# Altium PCB PCB1.PcbDoc
Units mil, origin at the board's own origin, x right, y up, seen from the top; angles counter-clockwise.
Board outline 2500.99 x 3057.36 mil, 2 copper layers (Top Layer, Bottom Layer); 33 components, 43 nets, 217 pads, 44 vias.
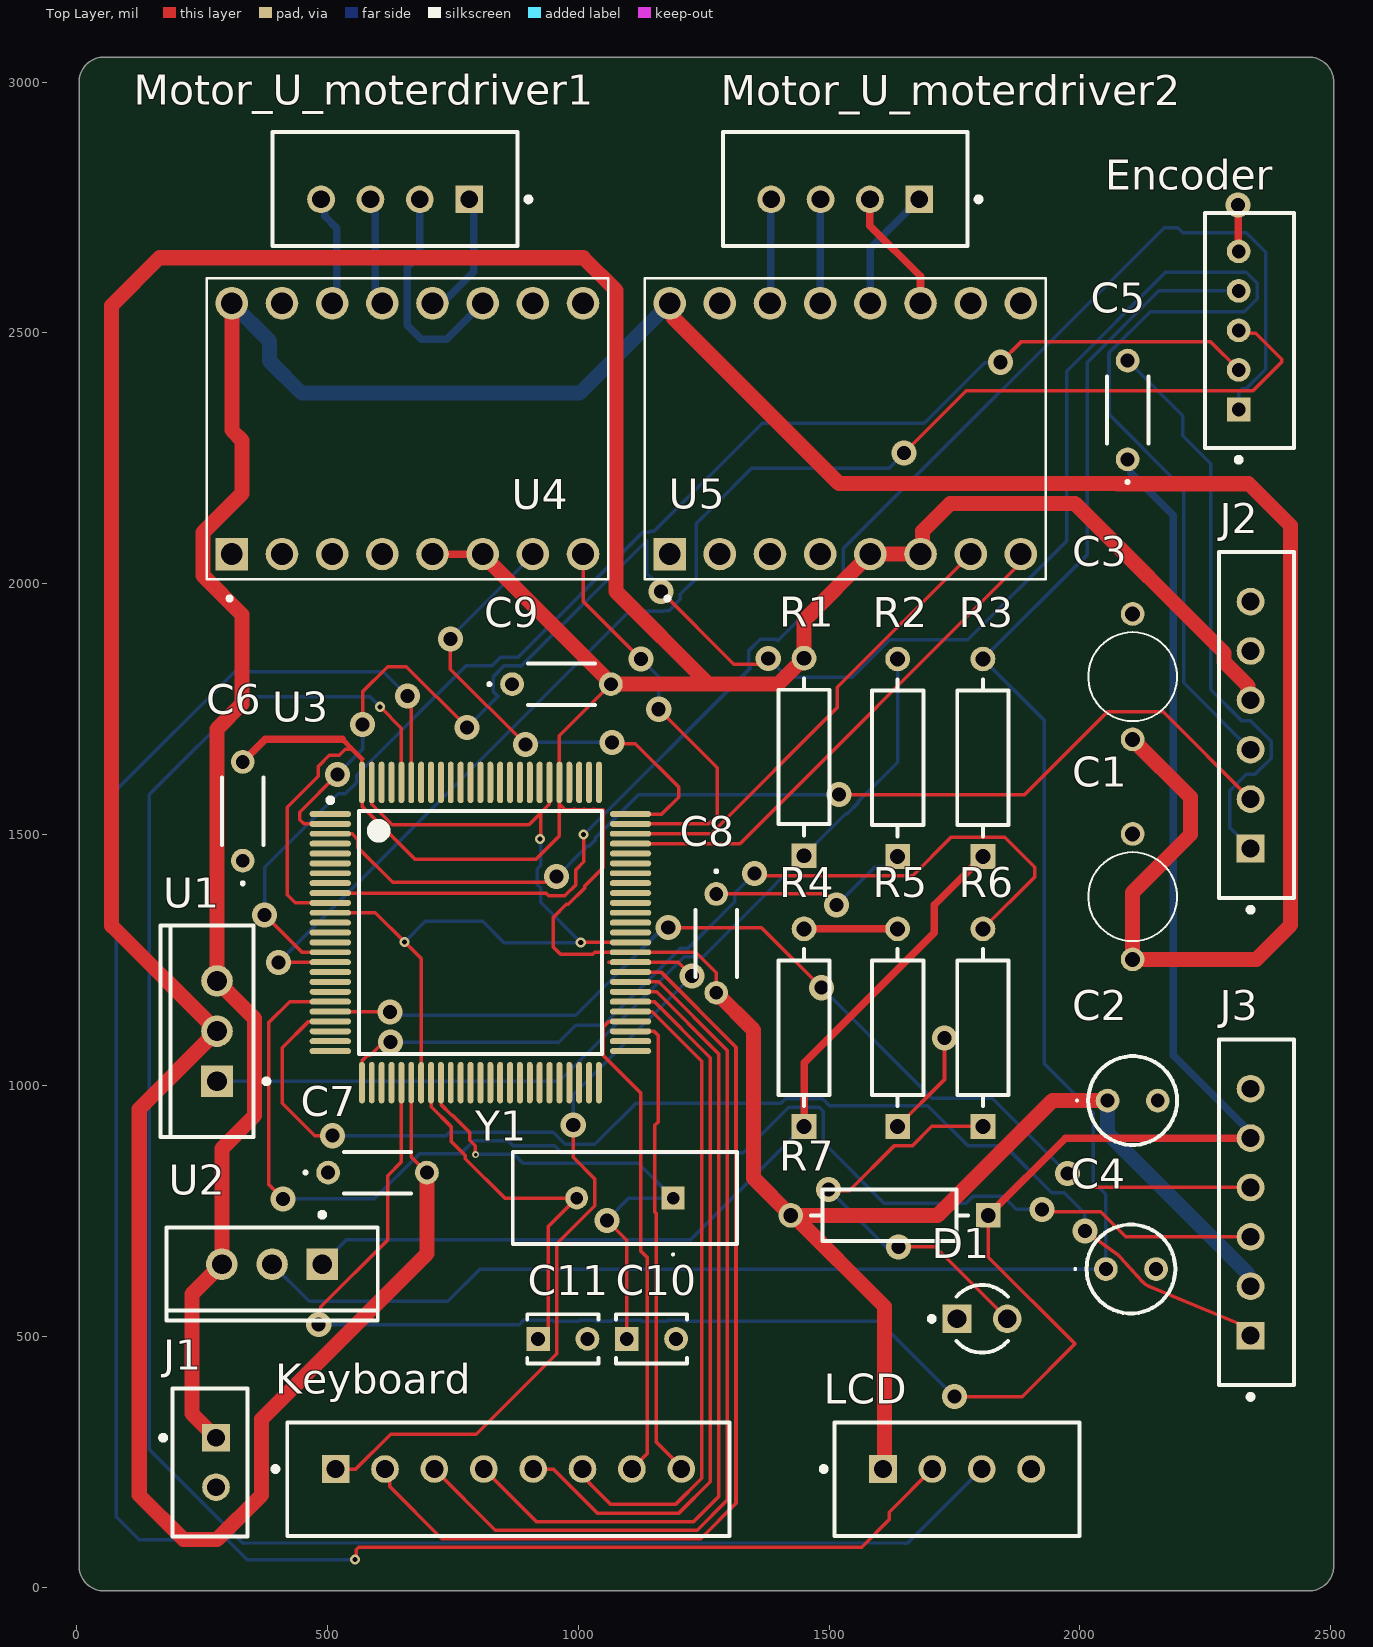
[diagram p0: Top Layer view]
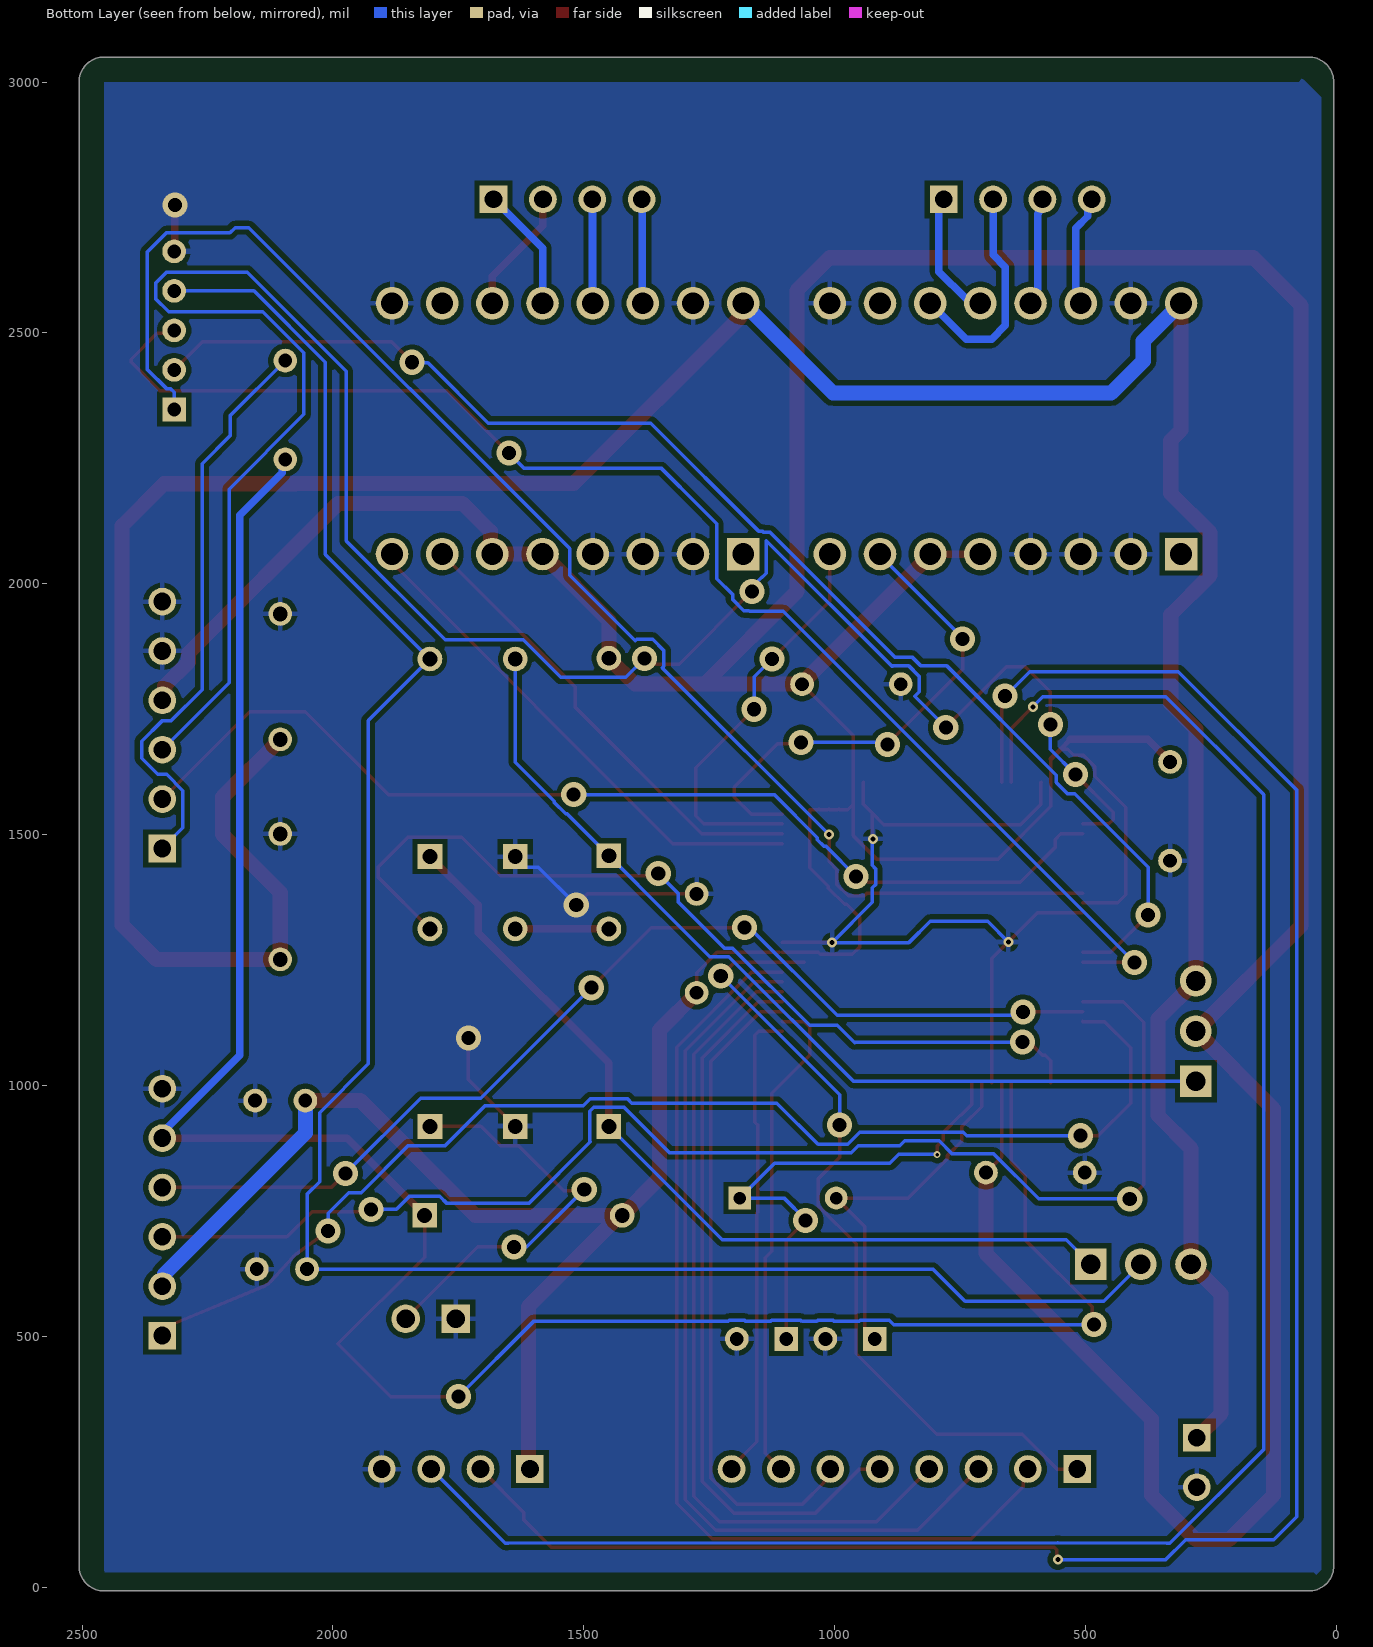
[diagram p1: Bottom Layer view, seen from below]
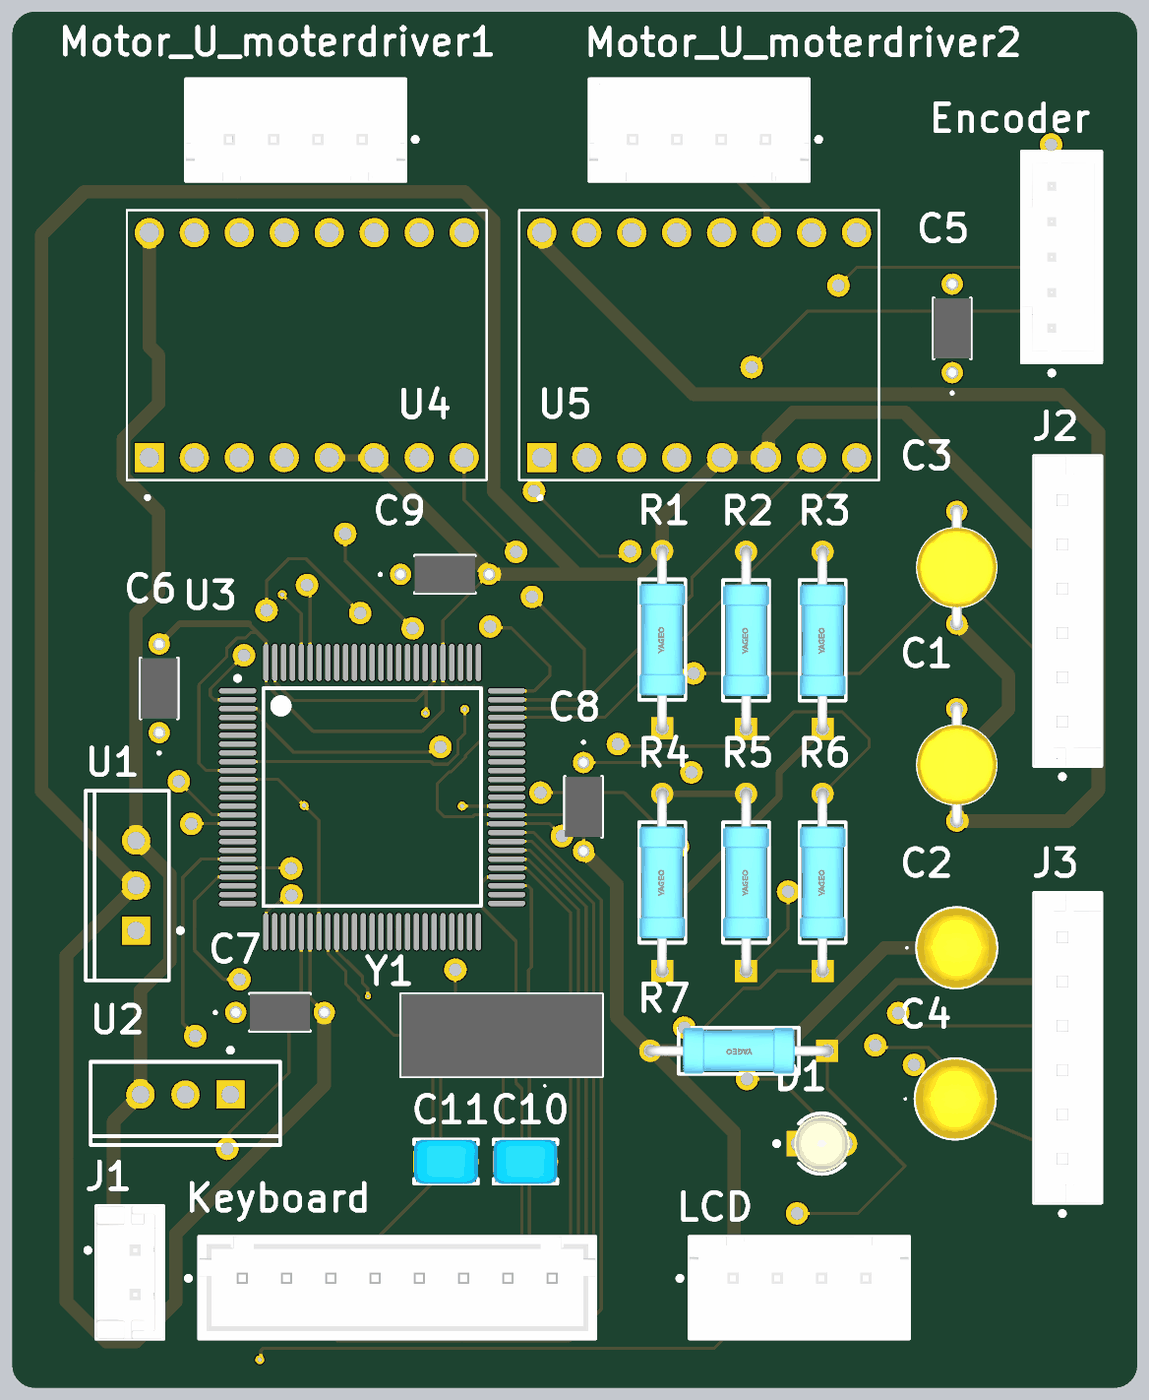
[diagram p2: 3D render of the assembled board from above, using the file's embedded part models]

## Layer stack, top to bottom
Top Solder: solder mask 0.4, Solder Resist, Dk 3.5
Top Layer: signal copper 1.4
Dielectric 1: dielectric 12.6, FR-4, Dk 4.8
Bottom Layer: signal copper 1.4
Bottom Solder: solder mask 0.4, Solder Resist, Dk 3.5

## Board outline
5,42.64 5,3000 cw(c55,3000) 55,3050 2455.99,3050 cw(c2455.99,3000) 2505.99,3000 2505.99,42.64 cw(c2455.99,42.64) 2455.99,-7.36 55,-7.36 cw(c55,42.64)

## Design rules (kind name [scope] priority, off if disabled: settings)
BoardOutlineClearance [All] p1: gap=7.87 ignorepadtopadclearanceinfootprint=FALSE
Clearance [All] p1: gap=8 ignorepadtopadclearanceinfootprint=TRUE except(9.84: Arc-Hole Track-Hole SMDPad-Hole THPad-Hole Via-Hole Fill-Hole Poly-Hole Region-Hole Text-Hole)
ComponentClearance [All] p1: gap=5 collisioncheckmode=3 verticalgap=5 showdistances=TRUE
DiffPairsRouting [All] p1: maxlimit=15 minlimit=7 mostfreqgap=8 toplayer_minwidth=7 toplayer_maxwidth=1000 toplayer_prefwidth=8 bottomlayer_minwidth=7 bottomlayer_maxwidth=1000 bottomlayer_prefwidth=8 maxuncoupledlength=500
Height [All] p1: minheight=0 maxheight=71497.94 prefheight=500
HoleSize [All] p1: absolutevalues=TRUE maxlimit=248.03 minlimit=11.81 maxpercent=80.000 minpercent=20.000
HoleToHoleClearance [All] p1: gap=9.84 allowstackedmicrovias=FALSE
MinimumAnnularRing [All] p1: minimumring=3
MinimumSolderMaskSliver [All] p1: minsoldermaskwidth=0
PlaneClearance [All] p1: clearance=8
PlaneConnect PlaneConnectPowerPads [InPadClass('PowerPads')] p1: planeconnectstyle=Direct reliefexpansion=20 reliefentries=4 reliefconductorwidth=10 reliefairgap=10
PlaneConnect [All] p2: pad.planeconnectstyle=Relief pad.reliefexpansion=11.81 pad.reliefentries=4 pad.reliefconductorwidth=8 pad.reliefairgap=8 via.planeconnectstyle=Direct via.reliefexpansion=11.81 via.reliefentries=4 via.reliefconductorwidth=5 via.reliefairgap=5
PolygonConnect PolygonConnectPowerPads [All vs (InPadClass('PowerPads'))] p1: connectstyle=Direct reliefconductorwidth=10 reliefentries=4 polygonreliefangle="90 Angle" airgapwidth=10
PolygonConnect [All] p2: thpad.connectstyle=Relief thpad.reliefconductorwidth=8 thpad.reliefentries=4 thpad.polygonreliefangle="90 Angle" thpad.airgapwidth=8 smdpad.connectstyle=Relief smdpad.reliefconductorwidth=8 smdpad.reliefentries=4 smdpad.polygonreliefangle="90 Angle" smdpad.airgapwidth=8 via.connectstyle=Direct via.reliefconductorwidth=5 via.reliefentries=4 via.polygonreliefangle="90 Angle" via.airgapwidth=5
RoutingVias [All] p1: holewidth=11.81 width=23.62 viastyle="Through Hole" minholewidth=11.81 minwidth=23.62 maxholewidth=23.62 maxwidth=259.84
SilkToSilkClearance [All] p1: silktosilkclearance=0
SilkToSolderMaskClearance [IsPad] p1: minsilkscreentomaskgap=5 clearancetoexposedcopper=TRUE
SolderMaskExpansion [All] p1: expansion=2.95 istentingtop=FALSE
Width [All] p1: maxlimit=1000 minlimit=7 preferedwidth=8 minimp=50.000000 maximp=50.000000 favimp=50.000000
20 further rules are at their usual default settings.

## Classes and differential pairs
channel class moterdriver: U_moterdriver1 U_moterdriver2
component class "U_power supply": C1 C2 C3 C4 J1 R1 R2 R3 R4 R5 U1 U2
component class U_moterdriver2: Motor_U_moterdriver2 U5
component class U_moterdriver1: Motor_U_moterdriver1 U4
component class U_inputs: Encoder Keyboard LCD
component class U_atmel: C5 C6 C7 C8 C9 C10 C11 D1 J2 J3 R6 R7 U3 Y1

## Components (designator, comment, footprint, x,y, rotation, side; value= is the part's Value field where it differs from the comment)
C1 "T354A105J035AT7301" T354A105J035AT7301 2105,1251.46 r90 top
C2 "T350A104K050AT" T350A104K050AT 2055,970.08 r0 top
C3 "T354A105J035AT7301" T354A105J035AT7301 2105,1690 r90 top
C4 "T350A104K050AT" T350A104K050AT 2051.62,634.33 r0 top
C5 "K104K15X7RH53H5G" K104K15X7RH53H5G 2095,2248.15 r90 top
C6 "K104K15X7RH53H5G" K104K15X7RH53H5G 331.35,1448.22 r90 top
C7 "K104K15X7RH53H5G" K104K15X7RH53H5G 501.52,826.53 r0 top
C8 "K104K15X7RH53H5G" K104K15X7RH53H5G 1275,1381.85 r270 top
C9 "K104K15X7RH53H5G" K104K15X7RH53H5G 868.15,1800 r0 top
C10 "RCE5C2A220J0DBH03A" FP-RCE0DB-MFG 1145.74,495 r0 top
C11 "RCE5C2A220J0DBH03A" FP-RCE0DB-MFG 969.21,495 r0 top
D1 "HLMP-1719" FP-HLMP-1719-MFG 1805,535 r0 top
Encoder "B5B-PH-K-S(LF)(SN)" FP-B5B-PH-K-S_LF_SN-MFG 2338.03,2505.17 r90 top
J1 "B2B-EH-A(LF)(SN)" FP-B2B-EH-A_LF_SN-MFG 266.2,248.78 r270 top
J2 "B6B-EH-A(LF)(SN)" FP-B6B-EH-A_LF_SN-MFG 2351.81,1718.58 r90 top
J3 "B6B-EH-A(LF)(SN)" FP-B6B-EH-A_LF_SN-MFG 2351.81,747.64 r90 top
Keyboard "B8B-XH-A(LF)(SN)" FP-B8B-XH-A_LF_SN-MFG 860.89,215 r180 top
LCD "B4B-XH-A(LF)(SN)" FP-B4B-XH-A_LF_SN-MFG 1755,215 r180 top
Motor_U_moterdriver1 "B4B-XH-A(LF)(SN)" FP-B4B-XH-A_LF_SN-MFG 635,2787.01 r0 top (schematic designator Motor)
Motor_U_moterdriver2 "B4B-XH-A(LF)(SN)" FP-B4B-XH-A_LF_SN-MFG 1532.18,2787.01 r0 top (schematic designator Motor)
R1 "MFR-25FBF52-1K18" FP-MFR-25-MFG 1450,1655 r90 top value=1.18kΩ
R2 "MFR-25FBF52-1K18" FP-MFR-25-MFG 1636.53,1653.35 r90 top value=1.18kΩ
R3 "MFR-25FBF52-1K18" FP-MFR-25-MFG 1806.61,1653.35 r90 top value=1.18kΩ
R4 "MFR-25FBF52-1K18" FP-MFR-25-MFG 1450,1115.4 r90 top value=1.18kΩ
R5 "MFR-25FBF52-1K18" FP-MFR-25-MFG 1636.53,1115.4 r90 top value=1.18kΩ
R6 "MFR-25FBF52-1K18" FP-MFR-25-MFG 1806.61,1115.4 r90 top value=1.18kΩ
R7 "MFR-25FBF52-1K18" FP-MFR-25-MFG 1620.28,741.23 r180 top value=1.18kΩ
U1 "LM317T" NDE0003A 279.98,1108.5 r90 top
U2 "LM317T" NDE0003A 389.73,644.05 r180 top
U3 "ATmega2560-16AU" 100A_M 805,1305 r0 top
U4 "DRV8825_STEPPER_MOTOR_DRIVER_CARRIER" IC_DRV8825_STEPPER_MOTOR_DRIVER_CARRIER 659.5,2309.31 r90 top
U5 "DRV8825_STEPPER_MOTOR_DRIVER_CARRIER" IC_DRV8825_STEPPER_MOTOR_DRIVER_CARRIER 1532.18,2309.31 r90 top (schematic designator U4)
Y1 "ECS-160-S-4" ECS160S4 1188.98,775.79 r180 top

## Footprints (in the part's own frame and the unit in brackets; to place one, negate y for a bottom-side part, rotate by r counter-clockwise, add the part's x,y. Pads: shape width x height; smd on the part's side, far side on the other; paste and mask are expansions set on the pad)
100A_M [mm] "Thin QFP, 100-Leads, Body 14x14mm, Pitch 0.5mm, IPC Low Density"
  oval 2.1x0.3 smd: 1(-7.6,6) 2(-7.6,5.5) 3(-7.6,5) 4(-7.6,4.5) 5(-7.6,4) 6(-7.6,3.5) 7(-7.6,3) 8(-7.6,2.5) 9(-7.6,2) 10(-7.6,1.5) 11(-7.6,1) 12(-7.6,0.5) 13(-7.6,0) 14(-7.6,-0.5) 15(-7.6,-1) 16(-7.6,-1.5) 17(-7.6,-2) 18(-7.6,-2.5) 19(-7.6,-3) 20(-7.6,-3.5) 21(-7.6,-4) 22(-7.6,-4.5) 23(-7.6,-5) 24(-7.6,-5.5) 25(-7.6,-6) 51(7.6,-6) 52(7.6,-5.5) 53(7.6,-5) 54(7.6,-4.5) 55(7.6,-4) 56(7.6,-3.5) 57(7.6,-3) 58(7.6,-2.5) 59(7.6,-2) 60(7.6,-1.5) 61(7.6,-1) 62(7.6,-0.5) 63(7.6,0) 64(7.6,0.5) 65(7.6,1) 66(7.6,1.5) 67(7.6,2) 68(7.6,2.5) 69(7.6,3) 70(7.6,3.5) 71(7.6,4) 72(7.6,4.5) 73(7.6,5) 74(7.6,5.5) 75(7.6,6)
  oval 0.3x2.1 smd: 26(-6,-7.6) 27(-5.5,-7.6) 28(-5,-7.6) 29(-4.5,-7.6) 30(-4,-7.6) 31(-3.5,-7.6) 32(-3,-7.6) 33(-2.5,-7.6) 34(-2,-7.6) 35(-1.5,-7.6) 36(-1,-7.6) 37(-0.5,-7.6) 38(0,-7.6) 39(0.5,-7.6) 40(1,-7.6) 41(1.5,-7.6) 42(2,-7.6) 43(2.5,-7.6) 44(3,-7.6) 45(3.5,-7.6) 46(4,-7.6) 47(4.5,-7.6) 48(5,-7.6) 49(5.5,-7.6) 50(6,-7.6) 76(6,7.6) 77(5.5,7.6) 78(5,7.6) 79(4.5,7.6) 80(4,7.6) 81(3.5,7.6) 82(3,7.6) 83(2.5,7.6) 84(2,7.6) 85(1.5,7.6) 86(1,7.6) 87(0.5,7.6) 88(0,7.6) 89(-0.5,7.6) 90(-1,7.6) 91(-1.5,7.6) 92(-2,7.6) 93(-2.5,7.6) 94(-3,7.6) 95(-3.5,7.6) 96(-4,7.6) 97(-4.5,7.6) 98(-5,7.6) 99(-5.5,7.6) 100(-6,7.6)
  silkscreen extent -7.72,-6.15 6.15,6.82, body extent -7,-7 7,7, height 1.6
ECS160S4 [mm]
  rect 1.155x1.155 hole 0.63: 1(0,0)
  round 1.155 hole 0.63: 2(4.88,0)
  silkscreen extent -3.23,-2.32 8.12,2.9, body extent -3.23,-2.32 8.12,2.32, height 3.6
FP-B2B-EH-A_LF_SN-MFG [mm]
  rect 1.4x1.4 hole 0.9 paste-1000 mask+0: 1(-1.25,0.3)
  round 1.4 hole 0.9 paste-1000 mask+0: 2(1.25,0.3)
  silkscreen extent -3.75,-2.5 3.75,1.9, body extent -3.85,-2 3.85,2, height 0.25
FP-B4B-XH-A_LF_SN-MFG [mm]
  rect 1.4x1.4 hole 0.9 paste-1000 mask+0: 1(3.75,-0.525)
  round 1.4 hole 0.9 paste-1000 mask+0: 2(1.25,-0.525) 3(-1.25,-0.525) 4(-3.75,-0.525)
  silkscreen extent -6.2,-2.88 6.87,2.88, body extent -6.3,-2.98 6.3,2.98, height 0.25
FP-B5B-PH-K-S_LF_SN-MFG [mm]
  rect 1.2x1.2 hole 0.7 paste-1000 mask+0: 1(-4,0.55)
  round 1.2 hole 0.7 paste-1000 mask+0: 2(-2,0.55) 3(0,0.55) 4(2,0.55) 5(4,0.55)
  silkscreen extent -6.67,-2.25 5.95,2.25, body extent -6.05,-2.35 6.05,2.35, height 0.25
FP-B6B-EH-A_LF_SN-MFG [mm]
  rect 1.4x1.4 hole 0.9 paste-1000 mask+0: 1(-6.25,0.3)
  round 1.4 hole 0.9 paste-1000 mask+0: 2(-3.75,0.3) 3(-1.25,0.3) 4(1.25,0.3) 5(3.75,0.3) 6(6.25,0.3)
  silkscreen extent -9.47,-1.9 8.75,1.9, body extent -8.85,-2 8.85,2, height 0.25
FP-B8B-XH-A_LF_SN-MFG [mm]
  rect 1.4x1.4 hole 0.9 paste-1000 mask+0: 1(8.75,-0.525)
  round 1.4 hole 0.9 paste-1000 mask+0: 2(6.25,-0.525) 3(3.75,-0.525) 4(1.25,-0.525) 5(-1.25,-0.525) 6(-3.75,-0.525) 7(-6.25,-0.525) 8(-8.75,-0.525)
  silkscreen extent -11.2,-2.88 11.92,2.88, body extent -11.3,-2.98 11.3,2.98, height 0.25
FP-HLMP-1719-MFG [mm]
  rect 1.45x1.45 hole 0.95 paste-1000 mask+0: 1(-1.27,0)
  round 1.45 hole 0.95 paste-1000 mask+0: 2(1.27,0)
  silkscreen extent -2.67,-1.71 1.3,1.71, body extent -2.22,-2.22 2.22,2.22, height 0.25
FP-MFR-25-MFG [mm]
  rect 1.25x1.25 hole 0.75 paste-1000 mask+0: 1(-5,0)
  round 1.25 hole 0.75 paste-1000 mask+0: 2(5,0)
  silkscreen extent -3.98,-1.3 3.98,1.3, body extent -5.72,-1.4 5.72,1.4, height 0.25
FP-RCE0DB-MFG [mm]
  rect 1.2x1.2 hole 0.7 paste-1000 mask+0: 1(-1.25,0)
  round 1.2 hole 0.7 paste-1000 mask+0: 2(1.25,0)
  silkscreen extent -1.8,-1.25 1.8,1.25, body extent -1.95,-1.35 1.95,1.35, height 0.25
IC_DRV8825_STEPPER_MOTOR_DRIVER_CARRIER [mm]
  rect 1.65x1.65 hole 1.1: 1(-6.35,8.89)
  round 1.65 hole 1.1: 2(-6.35,6.35) 3(-6.35,3.81) 4(-6.35,1.27) 5(-6.35,-1.27) 6(-6.35,-3.81) 7(-6.35,-6.35) 8(-6.35,-8.89) 9(6.35,-8.89) 10(6.35,-6.35) 11(6.35,-3.81) 12(6.35,-1.27) 13(6.35,1.27) 14(6.35,3.81) 15(6.35,6.35) 16(6.35,8.89)
  silkscreen extent -8.7,-10.16 7.62,10.16
K104K15X7RH53H5G [mm]
  round 1.2 hole 0.7: 1(0,0) 2(5,0)
  silkscreen extent -1.2,-1.05 4.2,1.05, body extent -0.25,-1.05 5.25,1.05, height 6.5
NDE0003A [mm] "FM, 3-Leads, Body 10.7x4.7mm, Pitch 2.54mm"
  rect 1.6x1.6 hole 1: 1(-2.54,0)
  round 1.6 hole 1: 2(0,0) 3(2.54,0)
  silkscreen extent -5.35,-2.63 5.35,2.85, body extent -5.4,-1.9 5.4,2.9, height 19.4
T350A104K050AT [mm]
  round 1.2 hole 0.7: 1(0,0) 2(2.54,0)
  silkscreen extent -1.6,-2.25 3.52,2.25, body extent -0.98,-2.25 3.52,2.25, height 7.04
T354A105J035AT7301 [mm]
  round 1.2 hole 0.75: 1(0,0) 2(6.35,0)
  silkscreen extent 0.92,-2.25 5.43,2.25, body extent -0.27,-2.25 6.63,2.25, height 8.63

## Part data
C1 C3: "Capacitor", Manufacturer_Name=KEMET, Mouser Part Number=80-T354A105J35AT-TR, Datasheet Link=https://content.kemet.com/datasheets/KEM_T2043_T35X.pdf, Height=8.6mm, Manufacturer_Part_Number=T354A105J035AT7301, Mouser Price/Stock=https://www.mouser.co.uk/ProductDetail/KEMET/T354A105J035AT7301?qs=eaG68hM7nzPCdlzS1u%252BjMg%3D%3D
C2 C4: "Capacitor", Manufacturer_Name=KEMET, Mouser Part Number=80-T350A104K50AT, Arrow Part Number=T350A104K050AT, Arrow Price/Stock=https://www.arrow.com/en/products/t350a104k050at/kemet-corporation?region=nac, Datasheet Link=https://content.kemet.com/datasheets/KEM_T2043_T35X.pdf, Height=7.1mm, Manufacturer_Part_Number=T350A104K050AT, Mouser Price/Stock=https://www.mouser.co.uk/ProductDetail/KEMET/T350A104K050AT?qs=O4djsYW3Gvb%252Bsic1QYKKdw%3D%3D
C5 C6 C7 C8 C9: "Capacitor", Manufacturer_Name=Vishay, Mouser Part Number=594-K104K15X7RH53H5G, Datasheet Link=https://www.vishay.com/docs/45250/kgseries.pdf, Height=6.4mm, Manufacturer_Part_Number=K104K15X7RH53H5G, Mouser Price/Stock=https://www.mouser.co.uk/ProductDetail/Vishay-BC-Components/K104K15X7RH53H5G?qs=DPoM0jnrROVmsAlOWkFXbA%3D%3D
C10 C11: library part CMP-06035-047347-1, "Cap Ceramic 22pF 100V C0G ±5% Radial 2.5mm +125°C Ammo Pack", Capacitance=22pF, Case/Package=Radial, Dielectric=C0G, Max Operating Temperature=125°C, Min Operating Temperature=-55°C, Package Quantity=2000, Ratings=AEC-Q200, Resistor Type=Ceramic, Tolerance=5%, Voltage=100V, Depth=2.5mm, Height=3.5mm, Height - Seated (Max)=0.138inch, Lead Diameter=0.5mm, Lead Pitch=0.098inch, Lead/Base Style=Straight, Length=3.6mm, Mount="Through Hole", Packaging="Tape and Reel", Termination=Radial, Voltage Rating=100V, Voltage Rating (DC)=100V, Width=0.098inch
D1: library part CMP-2000-06410-2, "LED YELLOW DIFFUSED T-1 T/H", Colour=Yellow, Forward Current=2mA, Forward Voltage=1.8V, Manufacturer=Broadcom, Package=0, Power Dissipation=17.5mW, Reverse Voltage=5V, Temperature="-40°C to +100°C", Temperature Range High=+100°C, Temperature Range Low=-40°C, Automotive=No, Category=Diode, ComponentLink2Description=Datasheet, ComponentLink2URL=https://docs.broadcom.com/docs/AV02-1557EN, Device Class L1=Optoelectronics, Device Class L2=LEDs, Device Class L3=unset, Digikey Description="LED YELLOW DIFFUSED T-1 T/H", Lead Free=Yes, Led Orientation=Straight, Luminous Intensity=2.1mcd, Manufacturer Part Number=HLMP-1719, Mouser Description="Standard LEDs - Through Hole Yellow Diffused 585nm 2.1mcd", Octopart=https://octopart.com/hlmp-1719-broadcom-71130405, RoHS=TRUE, Viewing Angle=50°, Wavelength=585nm
Encoder: library part CMP-2000-05908-2, "CONN HEADER VERT 5POS 2MM", Color=Natural, Contact Resistance=20mR, Current Rating=2A, Flammability Rating="UL94 V-0", Housing Color=White, Insulation Resistance=1MR, Max Operating Temperature=85°C, Max Voltage Rating (AC)=100V, Min Operating Temperature=-25°C, Connector Type=Header, Contact Finish - Mating=TIN, Contact Material=Brass, Contact Mating Length=0.13inch, Contact Plating=Tin, Contact Shape=Square, Contact Type="Male Pin", Depth=4.5mm, Fastening Type=Detent, Gender=Male, Height=9.4mm, Housing Material=Polyamide, Insulation Color=Natural, Insulation Material=Nylon, Lead Free="Lead Free", Lead Pitch=2mm, Length=11.9mm, Mated Stacking Heights=8mm, Material=Polyamide, Max Current Rating=2A, Mount="Through Hole", Number of Contacts=5, Number of Pins=5, Number of Poles=5, Number of Positions=5, Number of Rows=1, Orientation=Straight, Packaging=Bulk, Pitch=2mm, REACH SVHC="No SVHC", Series=PH, Termination=Solder, Voltage Rating=100V, Voltage Rating (AC)=100V, Width=4.5mm, Working Voltage=100V
J1: library part CMP-17439-000026-1, "CONN HEADER VERT 2POS 2.5MM", Color=Natural, Contact Resistance=20mR, Current Rating=3A, Housing Color=White, Max Operating Temperature=85°C, Max Voltage Rating (AC)=250V, Min Operating Temperature=-25°C, Connector Type=Plug, Contact Material="Copper Alloy", Contact Mating Length=0.13inch, Contact Plating=Tin, Contact Type="Male Pin", Depth=3.8mm, Fastening Type=Detent, Gender=Male, Housing Material=Nylon, Lead Free="Lead Free", Length=7.5mm, Max Current Rating=3A, Mount="Through Hole", Number of Contacts=2, Number of Positions=2, Number of Rows=1, Orientation=Straight, Packaging=Bulk, Pitch=2.5mm, Series=EH, Termination=Press-Fit, Voltage Rating=250V
J2 J3: library part CMP-17439-000293-1, "CONN HEADER VERT 6POS 2.5MM", Color=Natural, Current Rating=3A, Flammability Rating="UL94 V-0", Housing Color=White, Voltage Rating=250V, Connector Type=Header, Contact Finish - Mating=TIN, Contact Material=Brass, Contact Mating Length=0.13inch, Contact Plating=Tin, Contact Shape=Square, Contact Type="Male Pin", Fastening Type=Friction, Gender=Male, Insulation Color=Natural, Insulation Material=Nylon, Lead Free="Lead Free", Mated Stacking Heights=8.1mm, Mount="Through Hole", Number of Contacts=6, Number of Positions=6, Number of Rows=1, Orientation=Straight, Packaging=Bulk, Pitch=2.5mm, Series=EH, Termination=Solder
Keyboard: library part CMP-17438-000015-1, "CONN HEADER VERT 8POS 2.5MM", Color=Natural, Contact Resistance=20mR, Current Rating=3A, Housing Color=White, Insulation Resistance=1GR, Max Operating Temperature=85°C, Max Voltage Rating (AC)=250V, Min Operating Temperature=-25°C, Connector Type="Male Pin", Contact Material=Brass, Contact Plating=Tin, Contact Type="Male Pin", Depth=5.75mm, Fastening Type=Detent, Housing Material=Polyamide, Lead Free="Lead Free", Lead Pitch=2.5mm, Length=22.4mm, Max Current Rating=3A, Mount="Through Hole", Number of Contacts=8, Number of Positions=8, Number of Rows=1, Orientation=Straight, Packaging=Bulk, Pitch=2.5mm, REACH SVHC="No SVHC", Series=XH, Termination=Press-Fit, Voltage Rating=250V, Voltage Rating (AC)=250V, Wire/Cable Gauge=22AWG
LCD Motor_U_moterdriver1 Motor_U_moterdriver2: library part CMP-17439-000250-1, "CONN HEADER VERT 4POS 2.5MM", Color=Natural, Contact Resistance=20mR, Current Rating=3A, Flammability Rating="UL94 V-0", Housing Color=White, Insulation Resistance=1GR, Max Operating Temperature=85°C, Max Voltage Rating (AC)=250V, Min Operating Temperature=-25°C, Package Quantity=500, Connector Type=Header, Contact Finish - Mating=TIN, Contact Material=Brass, Contact Plating=Tin, Contact Shape=Square, Contact Type="Male Pin", Depth=5.75mm, Fastening Type=Detent, Gender=Male, Housing Material=Polyamide, Insulation Color=Natural, Insulation Material=Nylon, Lead Free="Lead Free", Lead Pitch=2.5mm, Length=12.4mm, Mated Stacking Heights=9.8mm, Material=Polyamide, Max Current Rating=3A, Max Voltage Rating (DC)=250V, Mount="Through Hole", Number of Contacts=4, Number of Positions=4, Number of Rows=1, Orientation=Straight, Packaging=Bulk, Pitch=2.5mm, REACH SVHC="No SVHC", Series=XH, Termination=Solder, Voltage Rating=250V, Voltage Rating (AC)=250V, Wire/Cable Gauge=22AWG
R1 R2 R3 R4 R5 R6 R7: library part CMP-03413-000001-1, "RES 1.18K OHM 1/4W 1% AXIAL", Manufacturer=Yageo, Package=MFR-25, Power Rating=0.25W, Resistance=1.18kΩ, Temperature="-55°C to +155°C", Temperature Coefficient=100ppm/°C, Temperature Range High=+155°C, Temperature Range Low=-55°C, Tolerance=1%, Voltage Rating=250V, Automotive=No, Category=Res, ComponentLink2Description=Datasheet, ComponentLink2URL=https://www.yageo.com/upload/media/product/products/datasheet/lr/Yageo_LR_MFR_1.pdf, Composition="Metal Film", Device Class L1="Passive Components", Device Class L2=Resistors, Device Class L3="Through-Hole Resistors", Digikey Description="RES 1.18K OHM 1/4W 1% AXIAL", Height=2.6mm, Ipc Land Pattern Name=RESAD1000W75L680D260, Lead Free=Yes, Manufacturer Part Number=MFR-25FBF52-1K18, Mouser Description="Metal Film Resistors 1.18K OHM 1/4W 1%", Octopart=https://octopart.com/mfr-25fbf52-1k18-yageo-56251681, RoHS=TRUE, Series=MFR
U1 U2: library part CMP-0062-02456-3, "3-Terminal Adjustable Regulator, 3-pin TO-220", Manufacturer="Texas Instruments", PackageTopMarking="NSUZXYTTE#*LM317T P+", PowerWise=N, ComponentLink1Description="Datasheet URL", ComponentLink1URL=http://www.ti.com/general/docs/lit/getliterature.tsp?genericPartNumber=LM317-N&fileType=pdf, CompType="LDO IC", PackageDescription="TO-220, Molded, 3 Lead, Straight", PackageReference=NDE0003A, PinCount=3, RoHS=N
U3: library part CMP-0095-00210-2, "8-bit AVR Microcontroller, 4.5-5.5V, 16MHz, 256KB Flash, 4KB EEPROM, 8KB SRAM, 86 GPIO pins, 100-pin TQFP, Industrial Grade (-40°C to 85°C), Pb-Free", Code_JEDEC=MS-026-AED, ComponentLink1Description="Manufacturer URL", ComponentLink1URL=http://www.atmel.com/, ComponentLink2Description="ATmega640/1280/1281/2560/2561 Datasheet", ComponentLink2URL=http://www.atmel.com/dyn/resources/prod_documents/doc2549.pdf, ComponentLink3Description="ATmega640/1280/1281/2560/2561 Summary", ComponentLink3URL=http://www.atmel.com/dyn/resources/prod_documents/2549S.pdf, DatasheetVersion="revN, May-2011", PackageDescription="100-Pin Thin Profile Plastic Quad Flat Pack (TQFP), 14 x 14 x 1.0 mm Body, 0.5 mm Pitch", PackageReference=100A, PackageVersion="revD, Oct-2010", RevisionNote="DatasheetVersion & PackageVersion updated. URLs added."
U4 U5: "Stepper motor controler; IC: DRV8825; 1.5A; Uin mot: 8.2Ã·45V", Package=None, Availability=Unavailable, MP=DRV8825_STEPPER_MOTOR_DRIVER_CARRIER, Price=None
Y1: "Crystal or Oscillator", Manufacturer_Name=ECS, Mouser Part Number=520-HCU1600-S, Datasheet Link=http://www.ecsxtal.com/store/pdf/hc_49us.pdf, Height=3.5mm, Manufacturer_Part_Number=ECS-160-S-4, Mouser Price/Stock=https://www.mouser.co.uk/ProductDetail/ECS/ECS-160-S-4?qs=CNVyLAqdhH0J%2FZuif68kGw%3D%3D

## Via types
v1: diameter 50, hole 28, Top Layer to Bottom Layer, 37 vias
v2: diameter 20, hole 10, Top Layer to Bottom Layer, 6 vias
v3: diameter 14, hole 7, Top Layer to Bottom Layer, 1 vias

## Nets (pads, with @x,y where several pads share a name; then routed paths per layer and width w, separated by ;. In a path a pad name is that pad's centre, name@x,y a point inside that pad or via, vN(x,y) a via of type N, cw(c..) or ccw(c..) an arc to the next point about the centre after c; other vN are vias at no path point)
GND: C1.2 C2.2 C3.2 C4.2 C6.1 C7.1 C8.1 C9.1 C10.2 C11.2 D1.1 Encoder.5 J1.2 J2.5 J2.6 J3.6 LCD.4 R2.1 R5.1 U3.11 U3.32 U3.62 U3.81 U3.99 U4.2 U4.3 U4.4 U4.9 U4.15 U5.2 U5.3 U5.4 U5.9 U5.15 | length 2442.6
  Top Layer w7: U3.11 595.63,1344.37 v2(653.87,1286.13) 686.89,1253.11 U3.32 ; U3.99 588.74,1603.93 588.74,1560.74 629.49,1520 901.77,1520 925,1543.23 ; v2(923.48,1491.72) 925,1493.23 925,1543.23 ; U3.81 942.52,1603.93 942.52,1560.74 925,1543.23 ; v2(1005,1285) 1005.16,1285.16 1104.06,1285.16 U3.62 ; C8.1 1493.15,1381.85 v1(1515,1360) ; R5.1 1730,1012.02 v1(1730,1095)
  Top Layer w15: v1(2315,2755) 2315.69,2754.31 2315.69,2663.34 Encoder.5
  Bottom Layer w7: v2(653.87,1286.13) 694.97,1327.24 809.61,1327.24 851.84,1285 v2(1005,1285) 925,1365 925,1394.05 918.49,1400.56 918.49,1432.45 925,1438.96 925,1490.2 v2(923.48,1491.72) ; v1(1515,1360) 1590.39,1435.39 1615.42,1435.39 R2.1
NetC1_1: C1.1 C3.1 J1.1 U1.3 U2.3 U4.16 U5.16 | length 6633.6
  Top Layer w10: J1.1 J1.1@295,314.98
  Top Layer w30: J1.1 230,346 230,584.32 U2.3 289.73,874.7 355,939.97 355,1133.47 U1.3 280,1710.91 330,1760.91 330,1938.49 252.01,2016.47 252.01,2102.14 330,2180.13 330,2285.76 309.5,2306.27 U4.16 ; U5.16 1188.87,2552.62 1188.87,2531.13 1520,2200 2074.39,2200 2074.86,2199.53 2336.37,2199.53 2420,2115.9 2420,1320 2351.46,1251.46 C1.1 2105,1385 2220,1500 2220,1575 C3.1
  Bottom Layer w30: U4.16 384.84,2483.96 384.84,2444.26 449.1,2380 1002.87,2380 U5.16
NetC4_1: C4.1 Encoder.4 R3.2 U2.2 | length 4074.6
  Bottom Layer w7: U2.2 463.77,570 740,570 804.33,634.33 C4.1 2051.62,783.09 2026.5,808.21 2026.5,946.08 1929.3,1043.28 1929.3,1727.5 R3.2 2015,2058.59 2015,2441.54 2157.37,2583.91 Encoder.4
NetC5_1: C5.1 J3.5 R7.1 U3.30 | length 4542.5
  Top Layer w7: v1(482.73,523.52) 486.78,527.56 486.78,559.02 620,692.24 620,820 647.52,847.52 U3.30 ; v1(1750,380) 1885,380 1990,485 1817.13,657.87 R7.1
  Top Layer w15: R7.1 1971.17,895.28 J3.5
  Bottom Layer w7: v1(482.73,523.52) 882.18,523.52 890.79,532.12 949.21,532.12 951.54,529.8 1000.72,529.8 1003.05,532.12 1033.8,532.12 1036.13,529.8 1064.98,529.8 1067.31,532.12 1125.74,532.12 1128.06,529.8 1177.25,529.8 1179.57,532.12 1210.33,532.12 1212.65,529.8 1600.2,529.8 v1(1750,380)
  Bottom Layer w15: C5.1 2101.17,2241.98 2101.17,2221.35 2185.8,2136.72 2185.8,1060.34 2340,906.13 J3.5
NetC5_2: C5.2 J2.1 | length 1162.7
  Bottom Layer w7: C5.2 2205,2335 2205,2295 2260.47,2239.53 2260.47,1789.26 2322.99,1726.73 2340.7,1726.73 2381.06,1686.37 2381.06,1652.36 2348.85,1620.15 2331.15,1620.15 2298.94,1587.95 2298.94,1513.58 J2.1
NetC10_1: C10.1 U3.34 Y1.1 | length 1005.4
  Top Layer w7: U3.34 726.54,1005.51 726.54,962.32 748.17,940.68 749.32,940.68 783.66,906.34 783.66,891.34 795,880 795,863 v3(795.5,862.5) ; v1(1057.63,730.87) 1096.52,691.98 C10.1
  Bottom Layer w7: v3(795.5,862.5) 796,863 872,863 890,845 1119.76,845 Y1.1 1100.79,775.79 1057.63,732.63 v1(1057.63,730.87)
NetC11_1: C11.1 U3.33 Y1.2 | length 761.9
  Top Layer w7: U3.33 706.85,1005.51 706.85,957.96 746.5,918.31 746.5,889.05 775,860.55 775,854.01 853.22,775.79 990.79,775.79 995,780 996.85,778.15 Y1.2 940.12,719.06 940.12,515.12 925,500 915,500 C11.1
NetD1_2: D1.2 R6.1 | length 825.7
  Top Layer w7: v1(1499.06,792.72) 1499.06,792.17 1500,791.23 1500,790 1540,790 1630.45,880.45 1666.73,880.45 1704.83,918.55 R6.1 ; v1(1638.63,678.41) 1711.59,678.41 D1.2
  Bottom Layer w7: v1(1499.06,792.72) 1613.38,678.41 v1(1638.63,678.41)
NetEncoder_1: Encoder.1 U3.9 | length 2886.9
  Top Layer w7: U3.9 935.31,1383.74 941.05,1378 972.94,1378 995.49,1400.56 995.49,1430.49 1010.87,1445.87 v2(1010.87,1500)
  Bottom Layer w7: v2(1010.87,1500) 1343.21,1832.34 1340.22,1835.33 1340.22,1867.23 1362.77,1889.78 1394.67,1889.78 1397.66,1886.79 1528.16,2017.29 1528.16,2070.32 2167.85,2710 2195,2710 2205.23,2699.77 2331.75,2699.77 2370.5,2661.03 2370.5,2428.05 2331.75,2389.31 2323.87,2389.31 2316.38,2381.81 Encoder.1
NetEncoder_2: Encoder.2 U3.15 | length 2663.2
  Top Layer w7: v1(375,1340) 449.37,1265.63 U3.15 ; v1(1841.94,2441.68) 1882.38,2482.12 2260.69,2482.12 Encoder.2
  Bottom Layer w7: v1(375,1340) 375,1435 521.5,1581.5 535.95,1581.5 558.5,1604.05 558.5,1618.5 777.12,1837.12 828.73,1837.12 845.73,1854.12 880.08,1854.12 1129.16,2103.2 1142.02,2103.2 1144.11,2105.29 1151.69,2105.29 1366.4,2320 1690,2320 1810.54,2440.54 1840.8,2440.54 v1(1841.94,2441.68)
NetEncoder_3: Encoder.3 U3.16 | length 2783.5
  Top Layer w7: v1(402.64,1245.62) 402.97,1245.94 U3.16 ; v1(1649.02,2260.45) 1773.38,2384.81 2344.81,2384.81 2402.1,2442.1 2402.1,2447.9 2350.5,2499.5 2322.05,2499.5 Encoder.3
  Bottom Layer w7: v1(402.64,1245.62) 1102.02,1945 1169.48,1945 1170.98,1946.5 1180.95,1946.5 1203.5,1969.05 1203.5,1979.02 1234.74,2010.26 1234.74,2071.28 1234.74,2119.74 1269.01,2154.01 1345,2230 1618.57,2230 v1(1649.02,2260.45)
NetJ2_2: J2.2 U3.3 | length 2098.7
  Top Layer w7: U3.3 506.07,1501.57 549.26,1501.57 560.63,1490.2 560.63,1474.37 630,1405 933.86,1405 945.36,1416.5 v1(956.99,1416.5) ; v1(1520,1580) 1890,1580 2055,1745 2165.94,1745 J2.2
  Bottom Layer w7: v1(956.99,1416.5) 1016.99,1476.5 1020.61,1476.5 1034.37,1490.27 1034.37,1493.88 1120.49,1580 v1(1520,1580)
NetJ2_3: J2.3 U3.2 | length 4425.6
  Top Layer w7: U3.2 453.46,1521.54 445,1530 445,1545 v1(520,1620) ; v1(570,1720) 570,1785 620,1835 657.37,1835 v1(778.42,1713.95) ; v1(1165,1985) 1310,1840 1390,1840 v1(1378.72,1851.28)
  Bottom Layer w7: v1(520,1620) 570,1670 v1(570,1720) ; v1(778.42,1713.95) 840.06,1775.59 831.03,1784.62 831.03,1815.38 852.77,1837.12 883.53,1837.12 885.32,1835.32 1136.2,2086.2 1136.2,2021.24 1144.11,2013.33 1145,2013.33 1165,1993.33 v1(1165,1985) ; v1(1378.72,1851.28) 1416.26,1813.74 1546.19,1813.74 1620.74,1888.3 1776.2,1888.3 1973.33,2085.43 1973.33,2423.91 2170.45,2621.03 2331.75,2621.03 2353.5,2599.29 2353.5,2568.54 2327.26,2542.29 2139.8,2542.29 2057.88,2460.38 2057.88,2337.77 2206.8,2188.85 2206.8,1802.57 J2.3
NetJ3_1: J3.1 U3.22 | length 2431.6
  Top Layer w7: U3.22 505.51,1127.56 462.32,1127.56 410,1075.24 410,965 475,900 v1(510,900) ; v1(2010,710) 2073.3,664.46 cw(c2051.62,634.33) 2079.18,659.2 2124.06,609.46 ccw(c2151.62,634.33) 2137.34,600.06 2315.94,525.63 J3.1
  Bottom Layer w7: v1(510,900) 736.46,900 743.46,907 950.05,907 974.05,883 1033,883 1115,965 1404.1,965 1412.76,973.66 1487.24,973.66 1500.9,960 1696.85,960 1776.41,880.45 1849.55,880.45 1943.5,786.5 1968.5,786.5 2009.5,745.5 2009.5,710.5 v1(2010,710)
NetJ3_3: J3.3 U3.20 | length 2682.3
  Top Layer w7: v1(411.75,774.12) 383.5,802.36 383.5,1125.9 424.81,1167.2 U3.20 ; v1(1924,753.3) 1928.8,748.5 2041.5,748.5 2091.57,698.43 J3.3
  Bottom Layer w7: v1(411.75,774.12) 593.45,774.12 682.99,863.66 765.2,863.66 791.54,890 860,890 870,880 953.01,880 967.01,866 1329.14,866 1419.8,956.66 1480.2,956.66 1488.11,948.75 1488.11,888.35 1487.38,887.62 1610,765 1772.59,765 1786.93,779.34 1847.32,779.34 1873.36,753.3 v1(1924,753.3)
NetJ3_4: J3.4 U3.21 | length 2130.8
  Top Layer w7: U3.21 617.48,1147.52 621.71,1143.29 v1(624.91,1146.48) ; v1(1179.35,1314.84) 1365.16,1314.84 v1(1485,1195) ; v1(1975,825) 2003.15,796.85 J3.4
  Bottom Layer w7: v1(624.91,1146.48) 624.91,1140.09 625,1140 995,1140 1170,1315 1179.19,1315 v1(1179.35,1314.84) ; v1(1485,1195) 1705,975 1825,975 v1(1975,825)
NetKeyboard_1: Keyboard.1 U3.60 | length 1619.4
  Top Layer w7: Keyboard.1 556.76,235.67 626.1,305 796.34,305 957.12,465.79 957.12,684.81 1033.09,760.78 1033.09,813.78 990,856.86 v1(990,921.5) ; 1060.74,1245.67 1109.33,1245.67 U3.60@1109.06,1245.94 ; U3.60 U3.60@1109.06,1245.94 ; v1(1226.95,1218.59) 1199.59,1245.94 U3.60@1109.06,1245.94
  Bottom Layer w7: v1(990,921.5) 990,981.63 v1(1226.95,1218.59)
NetKeyboard_2: Keyboard.2 U3.59 | length 1982.6
  Top Layer w7: Keyboard.2 624.04,226.46 624.04,200.96 728,97 1244.12,97 1314.44,167.32 1314.44,1076.65 1164.83,1226.26 1147.68,1226.26 U3.59
NetKeyboard_3: Keyboard.3 U3.58 | length 1804.8
  Top Layer w7: Keyboard.3 834.93,114 1237.08,114 1297.44,174.36 1297.44,1069.61 1160.47,1206.57 U3.58
NetKeyboard_4: Keyboard.4 U3.57 | length 1641.9
  Top Layer w7: Keyboard.4 916.35,131 1230.04,131 1280.44,181.4 1280.44,1062.57 1156.12,1186.89 U3.57
NetKeyboard_5: Keyboard.5 U3.56 | length 1466
  Top Layer w7: Keyboard.5 950.47,235.67 1038.13,148 1200.84,148 1263.44,210.6 1263.44,1055.52 1152.04,1166.93 1104.49,1166.93 U3.56
NetKeyboard_6: Keyboard.6 U3.55 | length 1311.4
  Top Layer w7: Keyboard.6 1008.53,222.65 1021.34,209.84 1021.34,208.66 1065,165 1193.8,165 1246.44,217.64 1246.44,1048.48 1147.68,1147.24 1104.49,1147.24 U3.55
NetKeyboard_7: Keyboard.7 U3.54 | length 989.7
  Top Layer w7: U3.54 1103.93,1127.56 1060.74,1127.56 1049.37,1116.19 1049.37,1060.51 1125,984.88 1125,670 1138,657 1138,267.16 1106.96,236.11 Keyboard.7
NetKeyboard_8: Keyboard.8 U3.53 | length 952.5
  Top Layer w7: U3.53 1150.9,1108.15 1159.05,1100 1159.05,926.88 1152.74,920.57 1152.74,747.46 1155,745.2 1155,290 1207.36,237.64 1209.33,235.67 Keyboard.8
NetLCD_2: LCD.2 U3.95 | length 4078.7
  Top Layer w7: v2(555,55) 557.49,57.49 557.49,75.14 562.35,80 1565,80 1620,135 1620,149.88 LCD.2 ; v1(660.02,1776.15) 667.2,1768.97 U3.95
  Bottom Layer w7: v2(555,55) 340.47,55 300.47,95 125,95 79.1,140.9 79.1,1590 80,1590 315,1825 611.17,1825 v1(660.02,1776.15)
NetLCD_3: LCD.3 U3.96 | length 3820.9
  Top Layer w7: v2(605,1755) 647.52,1712.48 U3.96
  Bottom Layer w7: v2(605,1755) 585,1775 340,1775 145,1580 145,274.51 329.8,89.7 331.86,87.65 337.65,87.65 554.85,88.5 cw(c555,50) 555.03,88.5 1650.4,87.65 1656.2,87.65 1658.25,89.7 LCD.3
NetMotor_U_moterdriver1_1: Motor_U_moterdriver1.1 U4.12 | length 256.8
  Bottom Layer w15: U4.12 719.05,2568.87 738.87,2568.87 792.13,2622.13 792.13,2756.85 Motor_U_moterdriver1.1
NetMotor_U_moterdriver1_2: Motor_U_moterdriver1.2 U4.11 | length 479
  Bottom Layer w7: U4.11@791.3,2551.3 805,2565 809.5,2560.5 U4.11
  Bottom Layer w15: Motor_U_moterdriver1.2 684.21,2655.56 659.51,2630.86 659.51,2515.49 687.15,2487.85 738.04,2487.85 796.4,2546.21 U4.11
NetMotor_U_moterdriver1_3: Motor_U_moterdriver1.3 U4.13 | length 216.9
  Bottom Layer w15: Motor_U_moterdriver1.3 593.46,2758.67 593.46,2739.32 595.28,2737.5 595.28,2587.04 609.5,2572.83 U4.13
NetMotor_U_moterdriver1_4: Motor_U_moterdriver1.4 U4.14 | length 224.1
  Bottom Layer w15: Motor_U_moterdriver1.4 494.99,2758.72 494.99,2733.18 518.99,2709.18 518.99,2568.81 U4.14
NetMotor_U_moterdriver2_1: Motor_U_moterdriver2.1 U5.12 | length 247.5
  Bottom Layer w15: U5.12 1582.18,2668.71 Motor_U_moterdriver2.1
NetMotor_U_moterdriver2_2: Motor_U_moterdriver2.2 U5.11 | length 248.8
  Top Layer w15: Motor_U_moterdriver2.2 1581.39,2713.61 1682.18,2612.82 U5.11
NetMotor_U_moterdriver2_3: Motor_U_moterdriver2.3 U5.13 | length 207.4
  Bottom Layer w7: U5.13 U5.13@1482.58,2559.7 ; Motor_U_moterdriver2.3@1482.58,2765.95 Motor_U_moterdriver2.3
  Bottom Layer w15: U5.13@1482.58,2559.7 Motor_U_moterdriver2.3@1482.58,2765.95
NetMotor_U_moterdriver2_4: Motor_U_moterdriver2.4 U5.14 | length 218.2
  Bottom Layer w7: U5.14@1375,2555 U5.14@1379.31,2559.31 ; U5.14 U5.14@1379.31,2559.31 ; U5.14@1383.36,2563.36 U5.14@1379.31,2559.31 ; Motor_U_moterdriver2.4@1383.36,2765.16 Motor_U_moterdriver2.4
  Bottom Layer w15: U5.14@1383.36,2563.36 Motor_U_moterdriver2.4@1383.36,2765.16
NetR1_1: R1.1 R2.2 U1.1 | length 1827.1
  Bottom Layer w7: U1.1 962.42,1008.5 1211.01,1257.09 1248.94,1257.09 1533.35,1541.5 1535.95,1541.5 1558.5,1564.05 1558.5,1566.65 1636.53,1644.68 R2.2
NetR3_1: R3.1 R4.1 U2.1 | length 1758.2
  Top Layer w15: R4.1@1450,920 1450,1045 1710,1305 1710,1359.89 R3.1
  Bottom Layer w7: U2.1 538.05,692.37 1223.82,692.37 R4.1
NetR4_2: R4.2 R5.2 | length 186.5
  Top Layer w15: R4.2 R5.2
NetR6_2: R6.2 U3.26 | length 1774
  Top Layer w7: U3.26 568.78,1043.78 569.06,1044.06 569.06,1049.26 580.43,1060.63 585.63,1060.63 611.49,1086.49 v1(625.75,1086.49) ; v1(1351.52,1422.78) 1355.91,1418.39 1666.73,1418.39 1742.94,1494.6 1850.4,1494.6 1910,1435 1910,1415.65 R6.2
  Bottom Layer w7: v1(625.75,1086.49) 958.51,1086.49 960,1085 995,1120 1049.88,1120 1203.96,1274.09 1219.73,1274.09 1312.12,1366.47 1312.12,1383.39 v1(1351.52,1422.78)
NetU3_72: U3.72 U5.8 | length 1027.2
  Top Layer w7: U3.72 1322.39,1482.17 1871.09,2030.87 1871.09,2048.22 U5.8
NetU3_73: U3.73 U5.7 | length 932.4
  Top Layer w7: U3.73 1264.93,1501.85 1516.48,1753.4 1516.48,1793.61 U5.7
NetU3_74: U3.74 U4.8 | length 811.7
  Top Layer w7: U4.8 1009.5,1965.5 v1(1125,1850) ; U3.74 1260.58,1521.54 1277,1537.96 1277,1633.4 v1(1160.4,1750)
  Bottom Layer w7: v1(1125,1850) 1160.4,1814.6 v1(1160.4,1750)
NetU3_75: U3.75 U4.7 | length 982.8
  Top Layer w7: v1(745,1890) 745,1830 v1(895,1680) ; v1(1067.37,1683.87) 1070.01,1681.23 1113.77,1681.23 1200,1595 1200,1575 1166.22,1541.22 U3.75
  Bottom Layer w7: v1(745,1890) 745,1892.41 909.5,2056.9 U4.7 ; v1(895,1680) 898.87,1683.87 v1(1067.37,1683.87)
VCC: C2.1 C6.2 C7.2 C8.2 C9.2 J2.4 J3.2 LCD.1 R1.2 R7.2 U1.2 U3.10 U3.31 U3.61 U3.80 U3.100 U4.5 U4.6 U5.5 U5.6 | length 12610.4
  Top Layer w7: U3.10 435.94,1364.06 420,1380 420,1555 481.5,1616.5 481.5,1635.95 504.05,1658.5 523.5,1658.5 535.61,1670.61 549.39,1670.61 ; 568.78,1651.22 U3.100 569.06,1603.93 569.06,1556.38 673.94,1451.5 916.5,1451.5 962.48,1497.48 U3.80 962.48,1697.48 C9.2 C9.2@1065,1801.9 ; U3.31 667.2,857.7 C7.2 ; U4.6@809.5,2057.41 U4.6 ; 962.76,1560.74 974.13,1549.37 990.2,1549.37 992.01,1551.18 993.81,1549.37 1009.89,1549.37 1011.69,1551.18 1013.5,1549.37 1029.57,1549.37 1031.38,1551.18 1033.18,1549.37 1049.26,1549.37 ; 1049.37,1549.26 1049.37,1515.95 1049.37,1490.2 1049.37,1434.37 1012.49,1397.49 1012.49,1393.51 979.98,1361 976,1361 950,1335 950,1276.16 964.66,1261.5 1028.99,1261.5 1033.12,1265.63 U3.61 ; U3.61@1110.28,1265.63 1234.35,1265.63 1275,1224.98 C8.2 ; R7.2 R7.2@1428.77,741.23 ; LCD.1 1607.36,237.36 LCD.1@1610,240
  Top Layer w10: 530,1690 549.39,1670.61 568.78,1651.22
  Top Layer w15: C6.2 376.28,1690 530,1690 ; U4.5 U4.6
  Top Layer w30: C7.2 698.37,664.88 368.5,335 368.5,183.5 280,95 213.5,95 125,183.5 125,953.52 U1.2 70,1318.47 70,2555 165,2650 1010,2650 1075,2585 1075,1985 1260,1800 ; U4.6@809.5,2057.41 C9.2@1065,1801.9 ; C9.2 1260,1800 ; C8.2 1349.02,1110.98 1349.02,815.64 R7.2 ; LCD.1@1610,240 1610,560 1428.77,741.23 1716.23,741.23 1945.08,970.08 C2.1 ; J2.4 2335.19,1772.6 2335.19,1796.69 2287.44,1844.45 2287.44,1862.56 1990,2160 1741.29,2160 1686.18,2104.89 1686.18,2063.31 U5.6 U5.5 1450,1927.13 R1.2 1398.15,1800 1260,1800
  Bottom Layer w30: C2.1 2055,905 2335.19,624.81 2335.19,604.81 J3.2
pads on no net: U3.1 U3.4 U3.5 U3.6 U3.7 U3.8 U3.12 U3.13 U3.14 U3.17 U3.18 U3.19 U3.23 U3.24 U3.25 U3.27 U3.28 U3.29 U3.35 U3.36 U3.37 U3.38 U3.39 U3.40 U3.41 U3.42 U3.43 U3.44 U3.45 U3.46 U3.47 U3.48 U3.49 U3.50 U3.51 U3.52 U3.63 U3.64 U3.65 U3.66 U3.67 U3.68 U3.69 U3.70 U3.71 U3.76 U3.77 U3.78 U3.79 U3.82 U3.83 U3.84 U3.85 U3.86 U3.87 U3.88 U3.89 U3.90 U3.91 U3.92 U3.93 U3.94 U3.97 U3.98 U4.1 U4.10 U5.1 U5.10

## Polygon pours and split planes (outlines as drawn)
GND on Bottom Layer "GND_L02_P000" (solid, pour order 0): 65,3010 75,3000 2455.99,3000 2455.99,34.01 2460,30 45,30 40,25 30,35 30,2970 65,3005

## Silkscreen, mask and mechanical layers (free items; w line width, h text height)
Mechanical 1:
  the board outline again, w10